# Altium PCB Wheel_Encoder_PCB2.PcbDoc
Units mil, origin at the board's own origin, x right, y up, seen from the top; angles counter-clockwise.
Board outline 6000 x 4000 mil, 2 copper layers (Top Layer, Bottom Layer); 7 components, 6 nets, 25 pads, 0 vias.
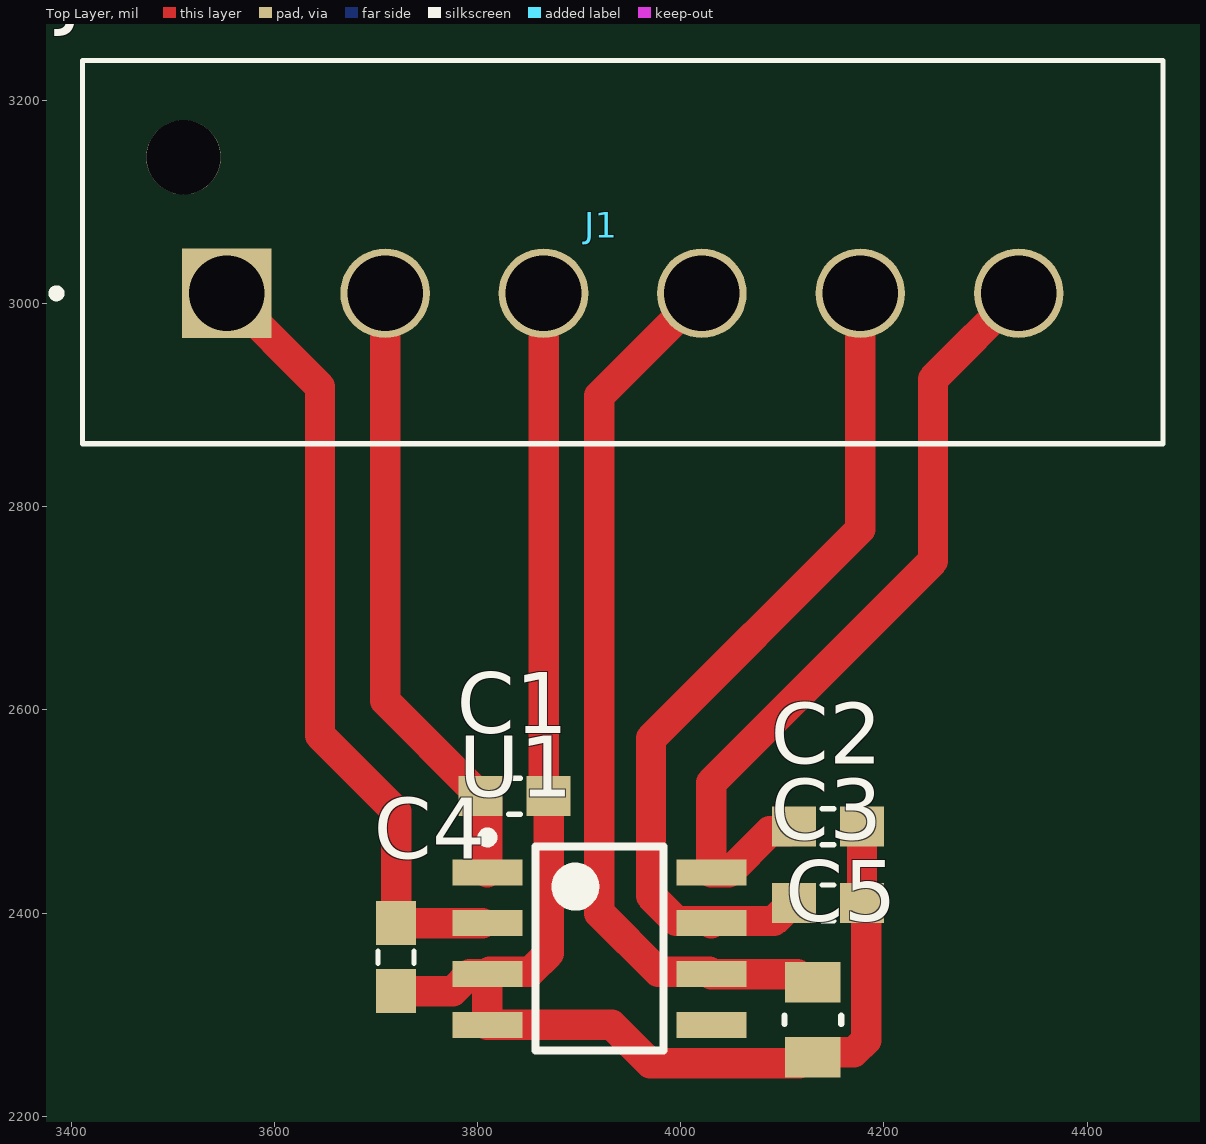
[diagram p0: Top Layer view]
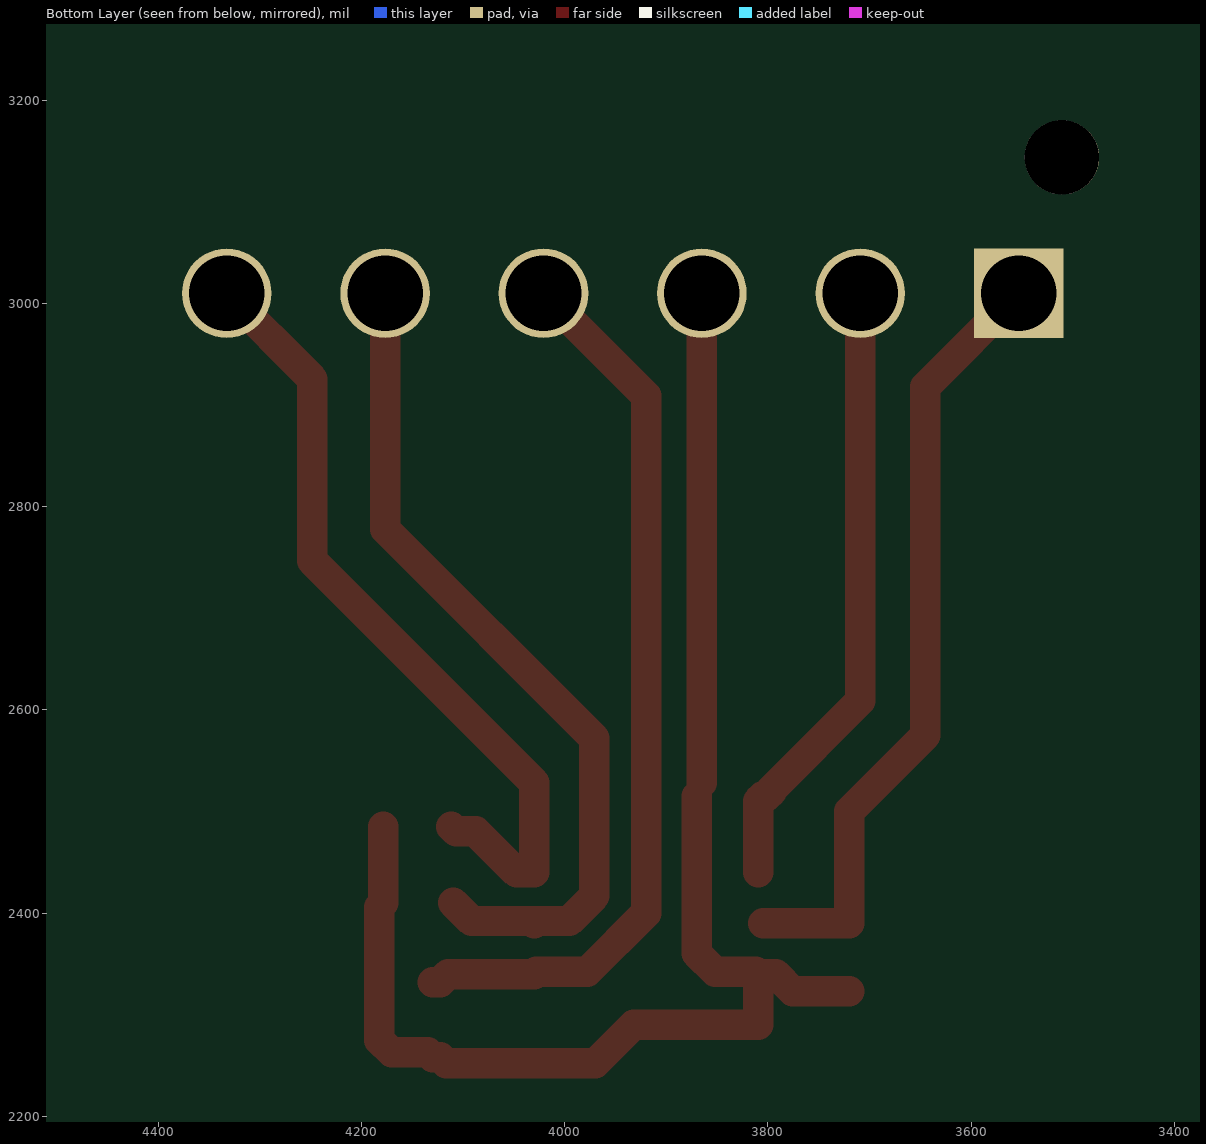
[diagram p1: Bottom Layer view, seen from below]

## Layer stack, top to bottom
Top Solder: solder mask 0.4, Solder Resist, Dk 3.5
Top Layer: signal copper 1.4
Dielectric 1: dielectric 12.6, FR-4, Dk 4.8
Bottom Layer: signal copper 1.4
Bottom Solder: solder mask 0.4, Solder Resist, Dk 3.5

## Board outline
1000,1000 7000,1000 7000,5000 1000,5000

## Design rules (kind name [scope] priority, off if disabled: settings)
Clearance [All] p1: gap=10 ignorepadtopadclearanceinfootprint=FALSE except(0: Arc-Hole Track-Hole SMDPad-Hole THPad-Hole Via-Hole Fill-Hole Poly-Hole Region-Hole Text-Hole)
PolygonConnect [All] p1: connectstyle=Relief reliefconductorwidth=10 reliefentries=4 polygonreliefangle="90 Angle" airgapwidth=10
RoomDefinition Wheel_Encoder_Board_Schematic1 [InComponentClass('Wheel_Encoder_Board_Schematic1')] p1: confinementstyle=ConfineIn formatcopy=TRUE lockcomponents=FALSE outline 7045,1060 8725,1060 8725,2285 7045,2285
RoutingVias [All] p1: holewidth=28 width=50 viastyle="Through Hole" minholewidth=28 minwidth=50 maxholewidth=28 maxwidth=50
SolderMaskExpansion [All] p1: expansion=4 istentingtop=FALSE
Width [All] p1: maxlimit=30 minlimit=10 preferedwidth=30 toplayer_minwidth=30 bottomlayer_maxwidth=10 bottomlayer_prefwidth=10 minimp=50.000000 maximp=50.000000 favimp=50.000000
30 further rules are at their usual default settings.

## Classes and differential pairs
component class Wheel_Encoder_Board_Schematic1: C1 C2 C3 C4 C5 U1

## Components (designator, comment, footprint, x,y, rotation, side; value= is the part's Value field where it differs from the comment)
C1 "0.068uF" 0603 3836.54,2515 r0 top
C2 "0.068uF" 0603 4145,2485 r0 top
C3 "0.068uF" 0603 4145,2410 r180 top
C4 "0.068uF" 0603 3720,2356.54 r90 top
C5 "0.1uF 25V" 0805 4130,2295 r90 top value=0.1uF
J1 "CONN HEADER VERT 6POS 3.96MM" "CN HDR 6POS 3.96MM" 3553.19,3010 r0 top
U1 "TLE5501" 8-SOIC 3920,2365 r0 top

## Footprints (in the part's own frame and the unit in brackets; to place one, negate y for a bottom-side part, rotate by r counter-clockwise, add the part's x,y. Pads: shape width x height; smd on the part's side, far side on the other; paste and mask are expansions set on the pad)
8-SOIC [mm]
  rect 1.75x0.65 smd: 1(-2.8,1.905) 2(-2.8,0.635) 3(-2.8,-0.635) 4(-2.8,-1.905) 5(2.8,-1.905) 6(2.8,-0.635) 7(2.8,0.635) 8(2.8,1.905)
  silkscreen extent -2.92,-2.55 1.6,2.9, body extent -2,-2.55 2,2.55, height 1.7
0603 [mm]
  rect 1.1x1 smd: 1(-0.85,0) 2(0.85,0)
  silkscreen extent -0.15,-0.45 0.15,0.45
0805 [mil]
  rect 40x55 smd: 1(-37,0) 2(37,0)
  silkscreen extent -4,-28 4,28
"CN HDR 6POS 3.96MM" [mm]
  rect 2.24x2.24 hole 1.89: 1(0,0)
  round 2.24 hole 1.89: 2(3.96,0) 3(7.92,0) 4(11.88,0) 5(15.84,0) 6(19.8,0)
  round 1.86 hole 1.86 unplated: None(-1.08,3.4)
  silkscreen extent -4.35,-3.76 23.41,5.82

## Part data
C1 C2 C3 C4: library part "CAP 0.068uF 16V", "CAP CER 0.068UF 16V X5R 0603/0805", Operating Temperature="-55°C ~ 85°C", Package=0603/0805, Rating=16V, Temperature Coefficient=X5R, Tolerance=10%
C5: library part "CAP 0.1uF 25V", "CAP CER 0.1UF 25V X7R 0805", Operating Temperature="-55°C ~ 125°C", Rating=25V, Temperature Coefficient=X7R, Tolerance=10%
J1: library part "CN HDR 6POS 3.96MM", Current Rating=7.5A, Supplier Part Number 1=A99849-ND, Voltage Rating=250VAC, Digikey=A99849-ND, Digikey Link=https://www.digikey.ca/product-detail/en/te-connectivity-amp-connectors/1877285-6/A99849-ND/2000097, MF="TE Connectivity", MP=1877285-6, SnapEDA_Link=https://www.snapeda.com/parts/1877285-6/TE%20Connectivity/view-part/2371244/?ref=snap, Supplier 1=Digi-Key
U1: "TMR 360deg Magnetic Encoder", Digi-Key Part Number=TLE5501E0001XUMA1DKR-ND, Manufacturer="Infineon Technologies", Manufacturer Part Number=TLE5501E0001XUMA1, Package=PG-DSO-8-16, Supplier Part Number 1=TLE5501E0001XUMA1CT-ND, Supplier 1=Digi-Key

## Nets (pads, with @x,y where several pads share a name; then routed paths per layer and width w, separated by ;. In a path a pad name is that pad's centre, name@x,y a point inside that pad or via, vN(x,y) a via of type N, cw(c..) or ccw(c..) an arc to the next point about the centre after c; other vN are vias at no path point)
D1: C4.2 J1.1 U1.2 | length 773.9
  Top Layer w30: J1.1 3645,2918.19 3645,2575 3720,2500 C4.2 U1.2@3804.76,2390
D2: C1.1 J1.2 U1.1 | length 614
  Top Layer w30: J1.2 3709.09,2608.98 3796.42,2521.65 3796.42,2519.69 3801.1,2515 C1.1 3805.04,2515 3809.76,2510.28 U1.1
D3: C1.2 C2.2 C3.1 C4.1 C5.1 J1.3 U1.3 U1.4 | length 1463.2
  Top Layer w10: C3.1@4180,2420 C3.1@4185,2415
  Top Layer w30: C4.1 3775.59,2323.07 3792.52,2340 U1.3 ; C1.2@3865,2528.46 J1.3@3865,3005 ; C1.2 3870,2360.24 3851.97,2342.2 3811.97,2342.2 U1.3 ; C2.2 C3.1 4182.5,2405.96 4182.5,2275.07 4170.43,2263 4135,2263 C5.1 4122.5,2258 4116.7,2252.2 3969.92,2252.2 3932.13,2290 U1.4 U1.3
D4: C5.2 J1.4 U1.6 | length 890
  Top Layer w30: J1.4 3920,2909.09 3920,2400 3977.8,2342.2 4028.03,2342.2 U1.6 4114.5,2340 4122.5,2332 C5.2
D5: C3.2 J1.5 U1.7 | length 836.7
  Top Layer w30: C3.2@4109.57,2410 4091.77,2392.2 4032.44,2392.2 U1.7 4028.03,2392.2 3995.43,2392.2 3970.79,2416.85 3970.79,2571.91 4176.81,2777.93 J1.5
D6: C2.1 J1.6 U1.8 | length 795.2
  Top Layer w30: C2.1 4106.85,2480.31 4087.8,2480.31 4047.48,2440 U1.8 4030.24,2528.48 4248.35,2746.59 4248.35,2925.63 J1.6
pads on no net: J1.None U1.5